# Altium PCB Proximity_Sensor.PcbDoc
Units mil, origin at the board's own origin, x right, y up, seen from the top; angles counter-clockwise.
Board outline 1936.72 x 784.95 mil, 2 copper layers (Top Layer, Bottom Layer); 13 components, 0 nets, 36 pads, 13 vias.
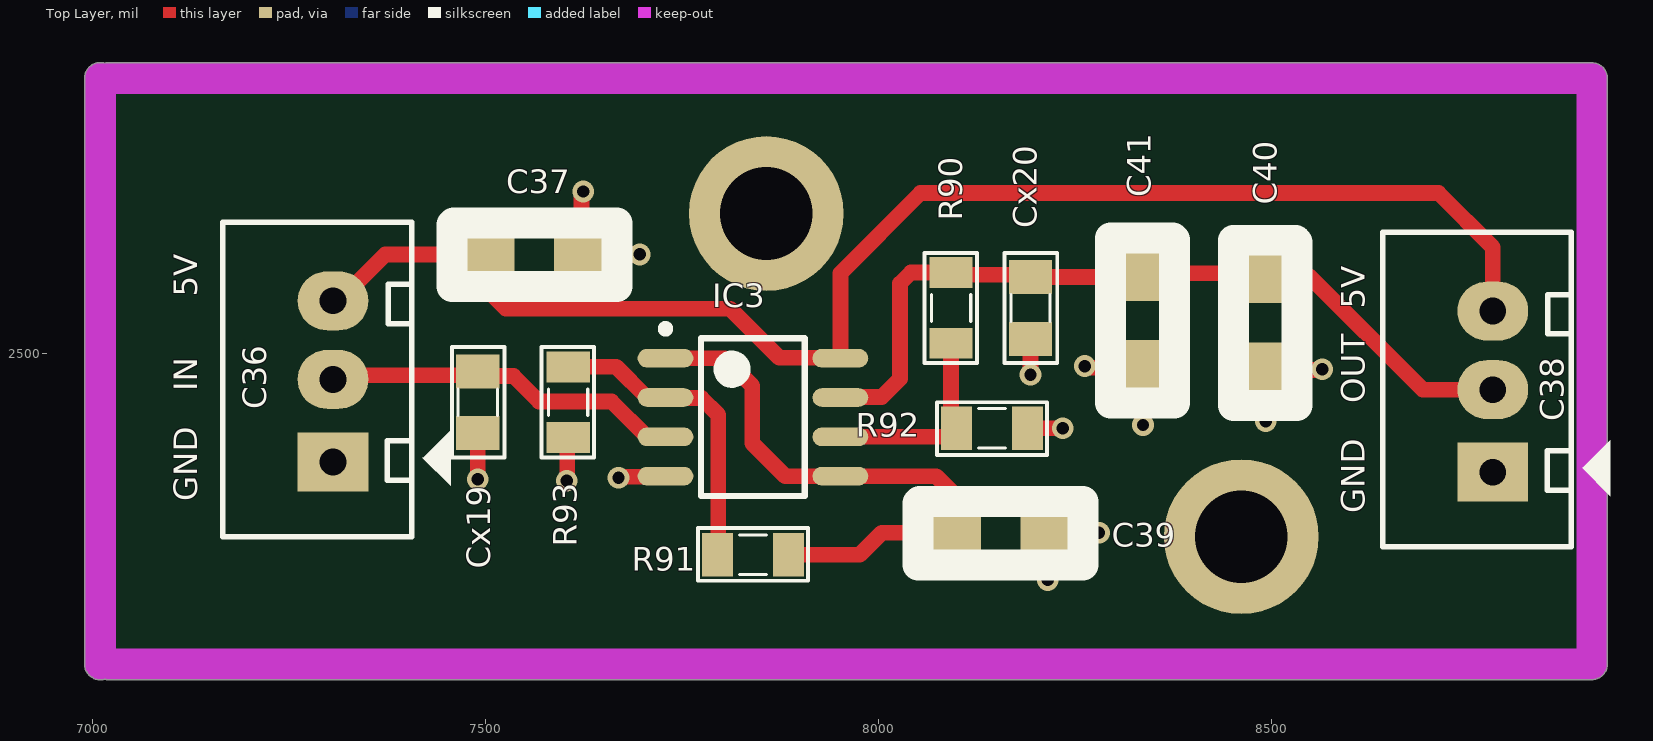
[diagram p0: Top Layer view]
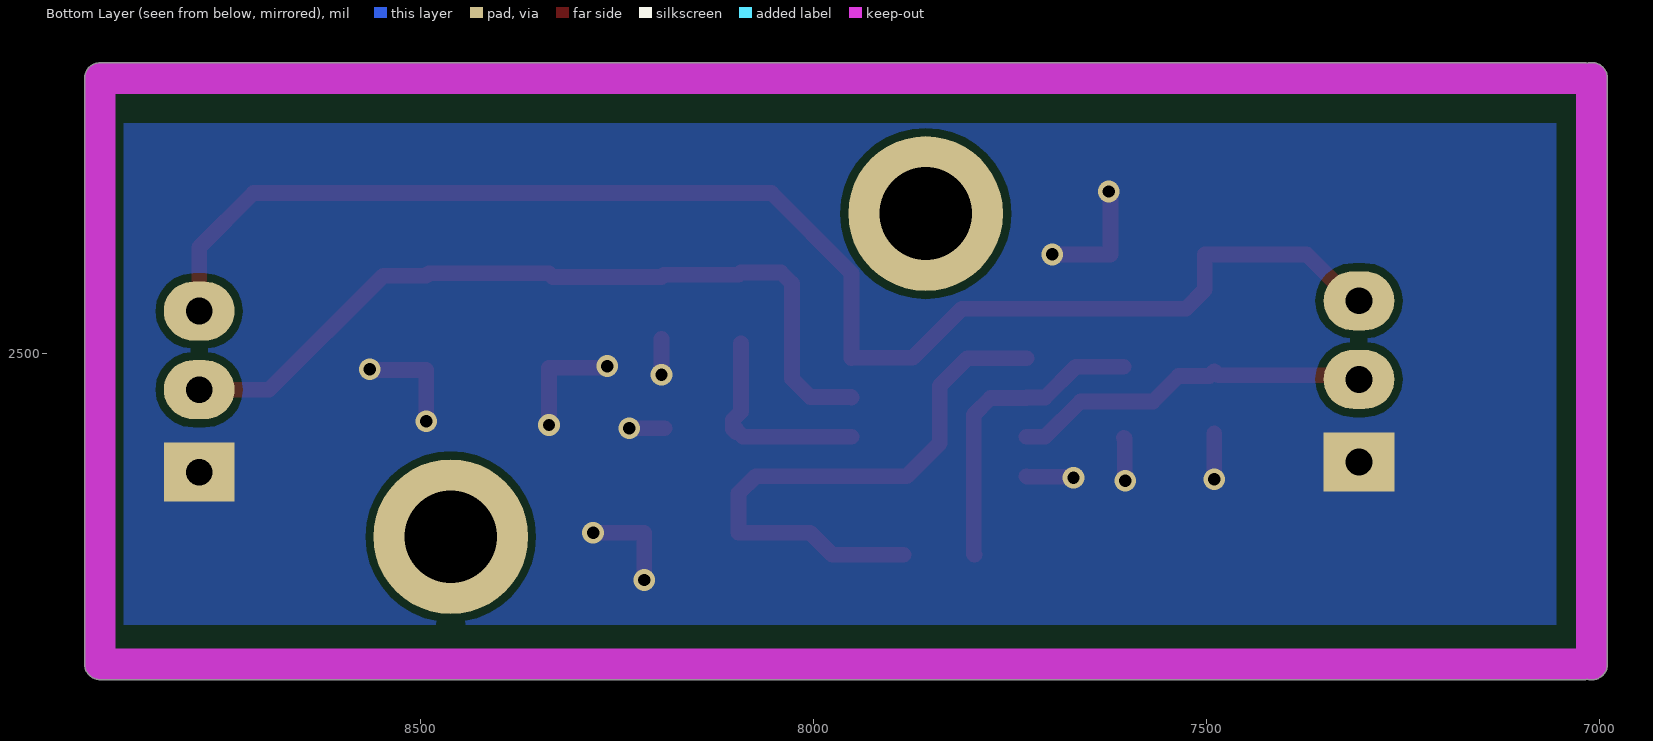
[diagram p1: Bottom Layer view, seen from below]

## Layer stack, top to bottom
Top Solder: solder mask 0.4, Solder Resist, Dk 3.5
Top Layer: signal copper 1.4
Dielectric 1: dielectric 12.6, FR-4, Dk 4.8
Bottom Layer: signal copper 1.4
Bottom Solder: solder mask 0.4, Solder Resist, Dk 3.5

## Board outline
6989.98,2105 ccw(c7010,2105) 7015.19,2085.67 ccw(c7019,2105) 7019,2085.3 8907,2085.3 ccw(c8907,2105) 8926.7,2105 8926.7,2850 ccw(c8907,2850) 8907,2869.7 7020,2869.7 ccw(c7020,2850) 7015.62,2869.21 ccw(c7010,2850) 6989.98,2850

## Design rules (kind name [scope] priority, off if disabled: settings)
Clearance [All] p1: gap=10 ignorepadtopadclearanceinfootprint=FALSE except(0: Arc-Hole Track-Hole SMDPad-Hole THPad-Hole Via-Hole Fill-Hole Poly-Hole Region-Hole Text-Hole)
PolygonConnect [All] p1: connectstyle=Relief reliefconductorwidth=10 reliefentries=4 polygonreliefangle="90 Angle" airgapwidth=10
RoutingVias [All] p1: holewidth=28 width=50 viastyle="Through Hole" minholewidth=28 minwidth=50 maxholewidth=28 maxwidth=50
SolderMaskExpansion [All] p1: expansion=4 istentingtop=FALSE
Width [All] p1: maxlimit=10 minlimit=10 preferedwidth=10
30 further rules are at their usual default settings.

## Components (designator, comment, footprint, x,y, rotation, side; value= is the part's Value field where it differs from the comment)
C36 "Header3" Header3 7306,2367 r90 top
C37 "10uF/16V" TANTALUM-3216 7502,2626 r0 top
C38 "Header3" Header3 8781,2354 r90 top
C39 "10uF/16V" TANTALUM-3216 8095,2272 r0 top
C40 "10uF/16V" TANTALUM-3216 8492,2599 r270 top
C41 "10uF/16V" TANTALUM-3216 8336,2602 r270 top
Cx19 "104" CN-SMD-0805 7490,2438 r90 top value=33pF
Cx20 "104" CN-SMD-0805 8193,2558 r90 top value=33pF
IC3 "LM358" SO8 7840,2419 r0 top
R90 "100k" RES-SMD-0805 8092,2558 r270 top
R91 "100k" RES-SMD-0805 7840,2244 r180 top
R92 "10k" RES-SMD-0805 8144,2405 r0 top
R93 "10k" RES-SMD-0805 7605,2438 r270 top

## Footprints (in the part's own frame and the unit in brackets; to place one, negate y for a bottom-side part, rotate by r counter-clockwise, add the part's x,y. Pads: shape width x height; smd on the part's side, far side on the other; paste and mask are expansions set on the pad)
CN-SMD-0805 [mil]
  rect 43.31x55 smd paste+0 mask+0: 1(-39.36,0.01) 2(39.37,0.01)
  silkscreen extent -70,-34 70,33, body extent -39,-25 39,25, height 31
Header3 [mil] "CON 3"
  rect 75x90 hole 34 paste+0 mask-90: 1(-5,0)
  oval 75x90 hole 34 paste+0 mask-90: 2(100,0) 3(200,0)
  silkscreen extent -100,-150 300,140, body extent -95,-90 295,136, height 276
RES-SMD-0805 [mil]
  rect 39.37x55 smd paste+0 mask+0: 1(-45,0) 2(45,0)
  silkscreen extent -70,-34 70,33, body extent -39,-25 39,25, height 31
SO8 [mm] "SOIC, 8-Leads, Body 4.9x3.9mm, Pitch 1.27mm, IPC High Density"
  oval 1.8x0.6 smd paste+0 mask+0: 1(-2.825,1.905) 2(-2.825,0.635) 3(-2.825,-0.635) 4(-2.825,-1.905) 5(2.825,-1.905) 6(2.825,-0.635) 7(2.825,0.635) 8(2.825,1.905)
  silkscreen extent -2.95,-2.55 1.68,2.98, body extent -2.99,-2.45 3,2.45, height 1.6
TANTALUM-3216 [mm]
  rect 1.78x1.27 smd paste+0 mask+0: 1(0,0) 2(3.048,0)
  silkscreen extent -1.14,-1.04 4.19,1.02, body extent -0.18,-0.91 3.22,0.89, height 1.79

## Part data
C36 C38: "Header IDC, 3 x 1 Pin Vertical 2.54mm Pitch (Non-Boxed, Male)", Manufacturer="W¨¹rth Elektronik eiSos GmbH", partNo=613002143121, ComponentLink1 Description=Manufacturer, ComponentLink1URL=http://www.we-online.com, ComponentLink2 Description=Datasheet, ComponentLink2URL=http://katalog.we-online.de/em/datasheet/6130xx143121.pdf, Created by="Karrer Zheng", Created Date="29 March 2013", NoPins=02
C37 C39 C40 C41: library part CN-TANTALUM-SMD
Cx19 Cx20: library part CN
IC3: "Low-Power Dual Operational Amplifier"
R90 R91 R92 R93: library part Res-SMD, "Resistor", Manufacturer="Generic Components", Class=Passive, Published=08/06/2000, Publisher="Altium Hobart Technology Centre"

## Free pads (board coordinates)
  round 196.85 hole 118.11 paste+0 mask+0: 2(7857,2678) 2(8461,2267)

## Via types
v1: diameter 27.56, hole 15.75, Top Layer to Bottom Layer, tented both sides, 13 vias

## Nets (pads, with @x,y where several pads share a name; then routed paths per layer and width w, separated by ;. In a path a pad name is that pad's centre, name@x,y a point inside that pad or via, vN(x,y) a via of type N, cw(c..) or ccw(c..) an arc to the next point about the centre after c; other vN are vias at no path point)
pads on no net: C36.1 C36.2 C36.3 C37.1 C37.2 C38.1 C38.2 C38.3 C39.1 C39.2 C40.1 C40.2 C41.1 C41.2 Cx19.1 Cx19.2 Cx20.1 Cx20.2 IC3.1 IC3.2 IC3.3 IC3.4 IC3.5 IC3.6 IC3.7 IC3.8 R90.1 R90.2 R91.1 R91.2 R92.1 R92.2 R93.1 R93.2
copper on no net: | length 5583.3
  Top Layer w20: 7306,2467 7311.19,2472.19 7484.81,2472.19 7489.99,2477.37 7495.97,2471.4 7535.6,2471.4 7568,2439 7660.16,2439 7705.16,2394 7728.78,2394 ; 7306,2567 7313.5,2567 7372.5,2626 7502,2626 7502,2581 7526,2557 7811,2557 7873.31,2494.69 7950.53,2494.69 7951.22,2494 7951.22,2602.22 8053,2704 8712,2704 8781,2635 8781,2554 ; v1(7490,2340) 7489.99,2398.64 ; v1(7603,2338) 7604,2339 7604,2392 7605,2393 ; 7605,2483 7666.16,2483 7705.16,2444 7728.78,2444 7729.47,2443.31 7774.69,2443.31 7796,2422 7796,2245 7795,2244 ; v1(7624,2706) 7622,2704 7622,2626 v1(7696,2626) ; v1(7669,2342) 7670.31,2343.31 7728.09,2343.31 7728.78,2344 ; 7728.78,2494 7804,2494 7839,2459 7839,2386 7881,2344 7951.22,2344 8073.24,2344 8095,2322.24 8095,2272 8003.82,2272 7975.82,2244 7885,2244 ; 7951.22,2394 8089.31,2394 8099,2403.69 8099,2405 ; 7951.22,2444 7951.91,2444.69 8003.69,2444.69 8027,2468 8027,2589 8041,2603 8092,2603 8094.81,2600.19 8190.18,2600.19 8192.99,2597.37 8331.37,2597.37 8336,2602 8489,2602 8492,2599 8547,2599 8692,2454 8781,2454 ; 8092,2513 8092,2425.81 8102,2415.81 8102,2408 8102,2403.69 8098.31,2400 ; 8189,2405 v1(8234,2405) ; v1(8193,2473) 8192.99,2518.64 ; v1(8215,2212) 8215,2272 v1(8280,2272) ; v1(8262,2484) 8264,2482 8336,2482 v1(8336,2409) ; v1(8492,2414) 8492,2479 8563,2479 v1(8564,2480)

## Polygon pours and split planes (outlines as drawn)
no net on Bottom Layer "NONET_L02_P000" (solid, remove dead copper, pour order 0): 7045,2803 8887,2803 8887,2145 7045,2145

## Keep-outs
Keep-Out Layer:
  lines w39.37: 7019,2105 8907,2105 8907,2850 7020,2850
  lines w40: 7010,2105 7010,2850

## Silkscreen, mask and mechanical layers (free items; w line width, h text height)
Top Overlay:
  text "5V" at 7133,2572 h30 r90
  text "5V" at 8618,2557 h30 r90
  text "IN" at 7133,2452 h30 r90
  text "OUT" at 8618,2437 h30 r90
  text "GND" at 7133,2312 h30 r90
  text "GND" at 8618,2297 h30 r90